# EAGLE board NusbioV2.Board (EAGLE 9.6.2)
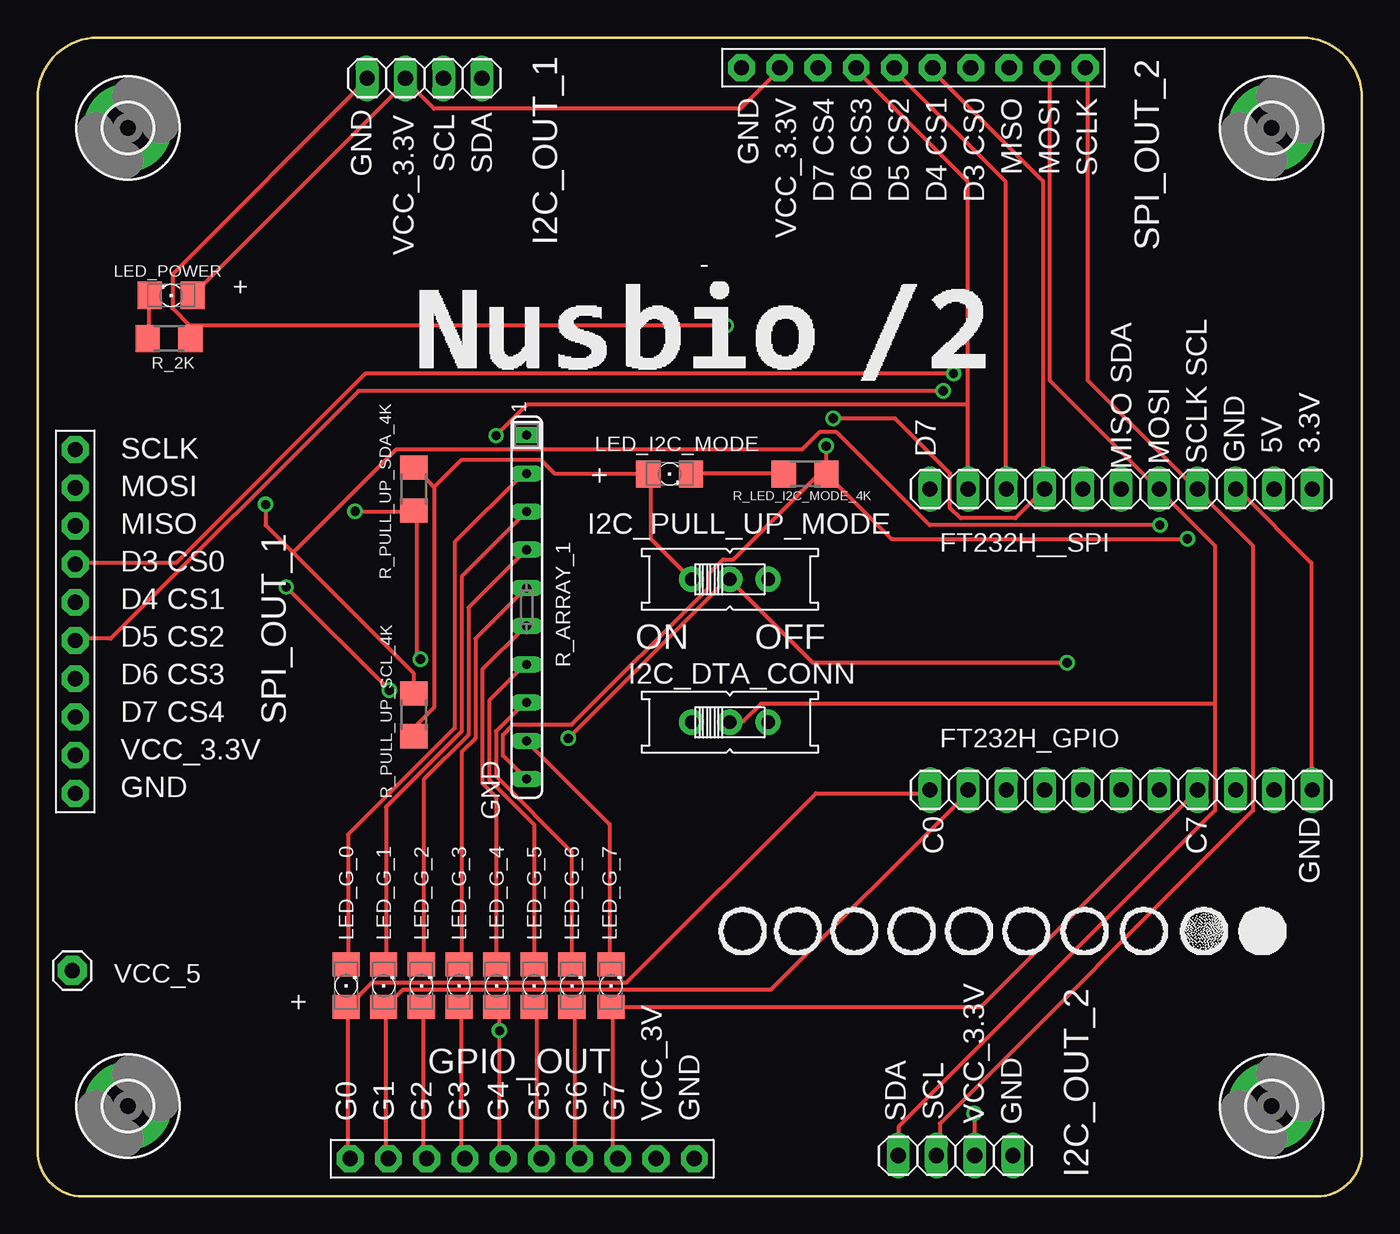
[diagram p0: board, top side]
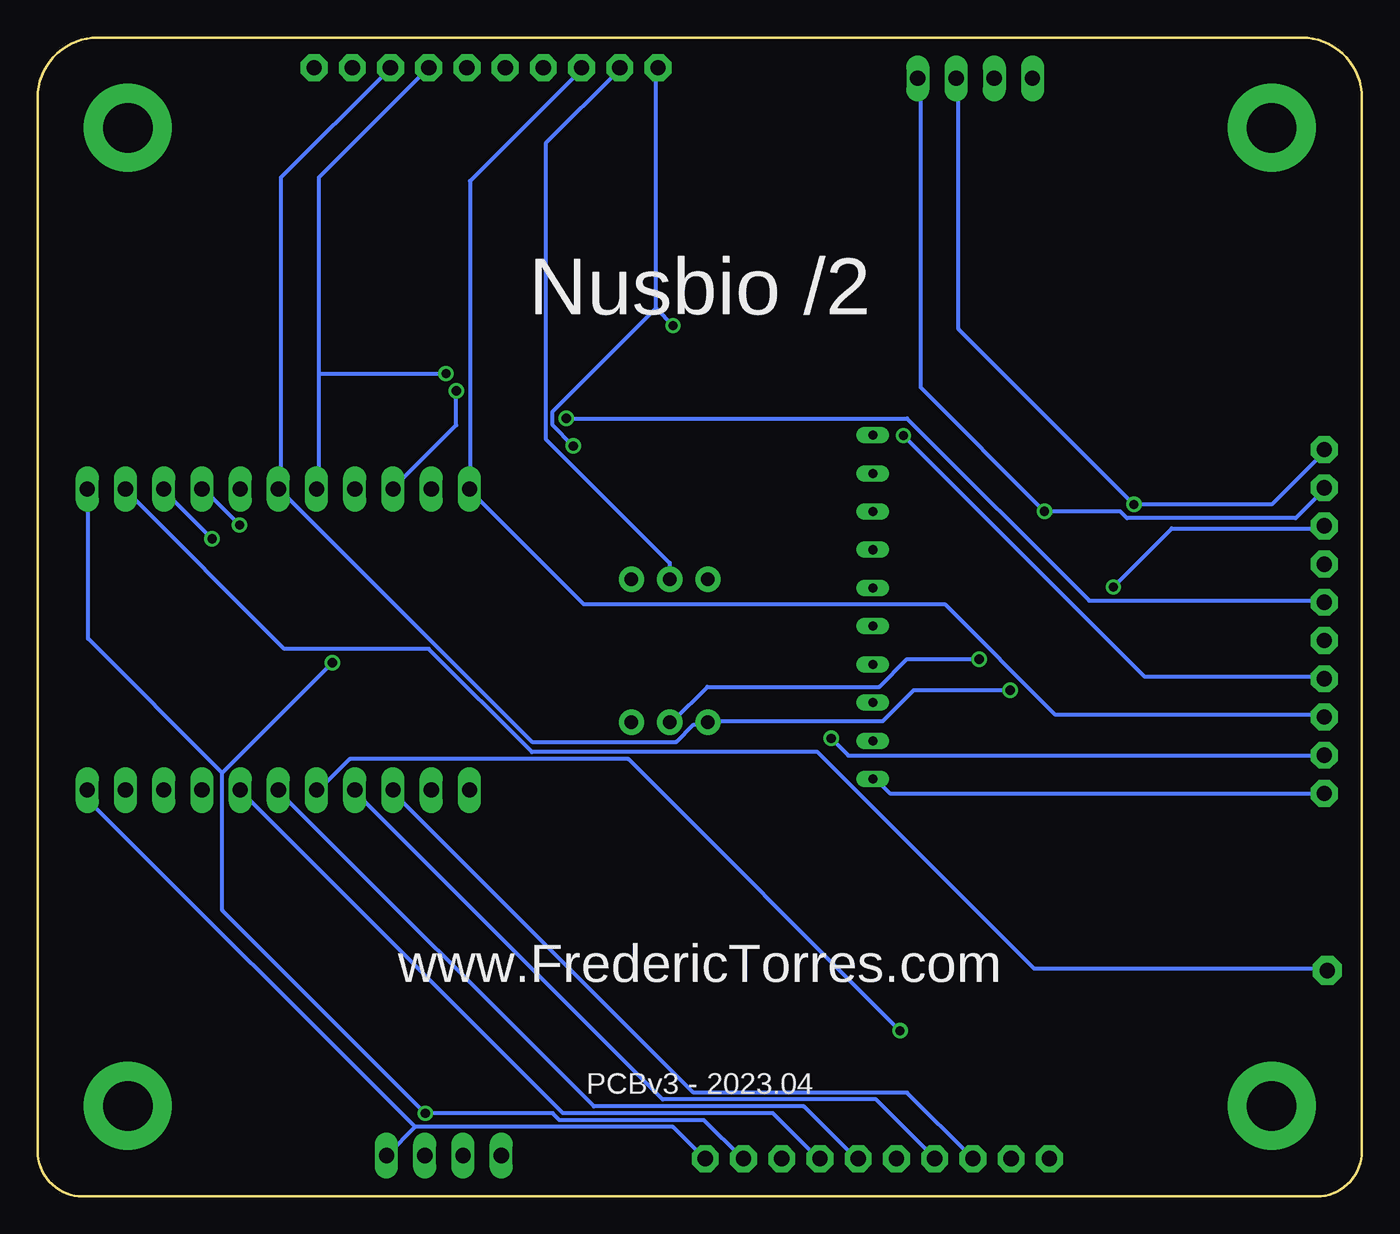
[diagram p1: board, bottom side, seen from below]

Size 88 x 77 mm. Coordinates in mm from the lower left corner, seen from the top.
Outline: 0,3 0,73 arc-90 4,77 84,77 arc-90 88,73 88,3 arc-90 85,0 3,0 arc-90 0,3
Copper layers (1*16): Top 0.035mm / dielectric 1.5mm / Bottom 0.035mm
Design rules "default": minimum track width 10mil, minimum drill 24mil, track to track 8mil, track to pad 8mil, pad to pad 8mil, via to via 8mil, smd to smd 8mil, copper to edge 40mil, drill to drill 8mil, minimum pad ring 10mil, minimum via ring 8mil, stop-mask expansion 4mil, vias tented up to drill 0mil, thermal gap 10mil

## Footprints (pad centres in the part's own frame; a part is rotated, then mirrored left to right if it is on the bottom)
1X11 = drill 1.016 long: 1 -12.7,0; 2 -10.16,0; 3 -7.62,0; 4 -5.08,0; 5 -2.54,0; 6 0,0; 7 2.54,0; 8 5.08,0; 9 7.62,0; 10 10.16,0; 11 12.7,0
1X10-BIG = drill 1.016 pad 1.778 octagon: 1 -11.43,0; 2 -8.89,0; 3 -6.35,0; 4 -3.81,0; 5 -1.27,0; 6 1.27,0; 7 3.81,0; 8 6.35,0; 9 8.89,0; 10 11.43,0
3,3-PAD = drill 3.3 pad 5.842: B3,3 0,0
EG1218 = drill 0.9 pad 1.676: O -2.54,0; P 0,0; S 2.54,0
1X04 = drill 1.016 long: 1 -3.81,0; 2 -1.27,0; 3 1.27,0; 4 3.81,0
1206 = smd 1.6 x 1.803: A -1.422,0; C 1.422,0
R1206 = smd 1.6 x 1.803: 1 -1.422,0; 2 1.422,0
SIP10 = drill 0.6 long: 1 -11.46,0; 2 -8.92,0; 3 -6.38,0; 4 -3.84,0; 5 -1.3,0; 6 1.24,0; 7 3.78,0; 8 6.32,0; 9 8.86,0; 10 11.4,0
1X01 = drill 1.016 pad 1.93 octagon: 1 0,0

## Placement (x,y rotation side)
FT232H__SPI  [1X11]  72,47 0 top
FT232H_GPIO  [1X11]  72,27 0 top
GPIO_OUT  PINHD-1X10  [1X10-BIG]  32.2,2.5 180 top
H1  MOUNT-PAD-ROUND3.3  [3,3-PAD]  82,6 0 top
H2  MOUNT-PAD-ROUND3.3  [3,3-PAD]  6,71 0 top
H3  MOUNT-PAD-ROUND3.3  [3,3-PAD]  6,6 0 top
H4  MOUNT-PAD-ROUND3.3  [3,3-PAD]  82,71 0 top
I2C_DTA_CONN  [EG1218]  46,31.5 0 top
I2C_OUT_1  [1X04]  25.7,74.3 180 top
I2C_OUT_2  [1X04]  61,2.7 0 top
I2C_PULL_UP_MODE  [EG1218]  46,41 0 top
LED_G_0  [1206]  20.5,14 90 top
LED_G_1  [1206]  23,14 90 top
LED_G_2  [1206]  25.5,14 90 top
LED_G_3  [1206]  28,14 90 top
LED_G_4  [1206]  30.5,14 90 top
LED_G_5  [1206]  33,14 90 top
LED_G_6  [1206]  35.5,14 90 top
LED_G_7  [1206]  38.1,14 90 top
LED_I2C_MODE  [1206]  42,48 0 top
LED_POWER  [1206]  8.88,59.87 180 top
R_2K  [R1206]  8.73,57 180 top
R_ARRAY_1  [SIP10]  32.5,39.12 270 top
R_LED_I2C_MODE_4K  [R1206]  51,48 180 top
R_PULL_UP_SCL_4K  [R1206]  25,32 270 top
R_PULL_UP_SDA_4K  [R1206]  25,47 90 top
SPI_OUT_1  PINHD-1X10  [1X10-BIG]  2.5,38.2 90 top
SPI_OUT_2  PINHD-1X10  [1X10-BIG]  58.2,75 0 top
VCC_5  [1X01]  2.3,15 0 top

## Library data of the parts
FT232H__SPI FT232H_GPIO I2C_OUT_1 I2C_OUT_2 = pinhead
GPIO_OUT I2C_DTA_CONN I2C_PULL_UP_MODE LED_G_0 LED_G_1-LED_G_7 LED_I2C_MODE LED_POWER R_2K R_LED_I2C_MODE_4K R_PULL_UP_SCL_4K R_PULL_UP_SDA_4K SPI_OUT_1 SPI_OUT_2 VCC_5 = adafruit
H1-H4 = holes
R_ARRAY_1 = resistor-sip

## Nets
C0: FT232H_GPIO.1 GPIO_OUT.10 LED_G_0.A
C1: FT232H_GPIO.2 GPIO_OUT.9 LED_G_1.A
C2: FT232H_GPIO.3 GPIO_OUT.8 LED_G_2.A
C3: FT232H_GPIO.4 GPIO_OUT.7 LED_G_3.A
C4: FT232H_GPIO.5 GPIO_OUT.6 LED_G_4.A
C5: FT232H_GPIO.6 GPIO_OUT.5 LED_G_5.A
C6: FT232H_GPIO.7 GPIO_OUT.4 LED_G_6.A
C7: FT232H_GPIO.8 GPIO_OUT.3 LED_G_7.A
D0_SCLK: FT232H__SPI.8 I2C_OUT_1.2 I2C_OUT_2.2 R_PULL_UP_SCL_4K.1 SPI_OUT_1.10 SPI_OUT_2.10
D1_MOSI: FT232H__SPI.7 I2C_DTA_CONN.P I2C_OUT_1.1 I2C_OUT_2.1 R_PULL_UP_SDA_4K.1 SPI_OUT_1.9 SPI_OUT_2.9
D2_MISO: FT232H__SPI.6 I2C_DTA_CONN.O SPI_OUT_1.8 SPI_OUT_2.8
D3_CS0: FT232H__SPI.5 SPI_OUT_1.7 SPI_OUT_2.7
D4_CS1: FT232H__SPI.4 SPI_OUT_1.6 SPI_OUT_2.6
D5_CS2: FT232H__SPI.3 SPI_OUT_1.5 SPI_OUT_2.5
D6_CS3: FT232H__SPI.2 SPI_OUT_1.4 SPI_OUT_2.4
D7_CS4: FT232H__SPI.1 SPI_OUT_1.3 SPI_OUT_2.3
DO_NOT_USE: R_ARRAY_1.1
GND: FT232H__SPI.9 FT232H_GPIO.11 GPIO_OUT.1 I2C_OUT_1.4 I2C_OUT_2.4 R_2K.1 R_ARRAY_1.10 R_LED_I2C_MODE_4K.1 SPI_OUT_1.1 SPI_OUT_2.1
N$1: LED_POWER.C R_2K.2
N$2: I2C_PULL_UP_MODE.O LED_I2C_MODE.A R_PULL_UP_SCL_4K.2 R_PULL_UP_SDA_4K.2
N$3: LED_I2C_MODE.C R_LED_I2C_MODE_4K.2
N$4: H1.B3,3
N$5: H4.B3,3
N$6: H3.B3,3
R_G_0: LED_G_0.C R_ARRAY_1.2
R_G_1: LED_G_1.C R_ARRAY_1.3
R_G_2: LED_G_2.C R_ARRAY_1.4
R_G_3: LED_G_3.C R_ARRAY_1.5
R_G_4: LED_G_4.C R_ARRAY_1.6
R_G_5: LED_G_5.C R_ARRAY_1.7
R_G_6: LED_G_6.C R_ARRAY_1.8
R_G_7: LED_G_7.C R_ARRAY_1.9
VCC_5: FT232H__SPI.10 VCC_5.1
VCC_33: FT232H__SPI.11 GPIO_OUT.2 I2C_OUT_1.3 I2C_OUT_2.3 I2C_PULL_UP_MODE.P LED_POWER.A SPI_OUT_1.2 SPI_OUT_2.2

## Tracks (layer width: path | path; a pad name or v marks a point on that pad's centre or on a via)
C0
  Top 0.254: GPIO_OUT.10 20.63,2.54 20.63,12.38 LED_G_0.A 20.63,12.6 22.23,14.2 39.15,14.2 51.72,26.78 59.27,26.78 FT232H_GPIO.1
C1
  Top 0.254: GPIO_OUT.9 23.15,2.54 23.15,12.38 LED_G_1.A 23.15,12.6 24.29,13.75 48.75,13.75 61.78,26.78 FT232H_GPIO.2
C2
  Top 0.254: LED_G_2.A 25.66,12.38 25.66,2.54 GPIO_OUT.8
  Bottom 0.254: FT232H_GPIO.3 64.29,26.78 44.41,6.89 30.23,6.89 25.89,2.54 GPIO_OUT.8
C3
  Top 0.254: LED_G_3.A 28.18,12.38 28.18,2.54 GPIO_OUT.7
  Bottom 0.254: FT232H_GPIO.4 66.81,26.78 46.46,6.43 32.29,6.43 28.4,2.54 GPIO_OUT.7
C4  (via drill 0.61)
  Top 0.254: LED_G_4.A 30.69,12.38 v30.69,11 30.69,2.77 30.92,2.54 GPIO_OUT.6
  Bottom 0.254: v30.69,11 48.75,29.06 67.27,29.06 69.32,27.01 FT232H_GPIO.5
C5
  Top 0.254: LED_G_5.A 33.2,12.38 33.2,2.77 33.43,2.54 GPIO_OUT.5
  Bottom 0.254: FT232H_GPIO.6 71.84,26.78 51.03,5.97 37.09,5.97 33.66,2.54 GPIO_OUT.5
C6
  Top 0.254: LED_G_6.A 35.72,12.38 35.72,2.77 35.95,2.54 GPIO_OUT.4
  Bottom 0.254: FT232H_GPIO.7 74.35,26.78 53.09,5.52 39.15,5.52 36.18,2.54 GPIO_OUT.4
C7
  Top 0.254: GPIO_OUT.3 38.46,2.54 38.23,2.77 38.23,12.38 LED_G_7.A 38.23,12.6 62.69,12.6 76.87,26.78 FT232H_GPIO.8
D0_SCLK  (via drill 0.61)
  Top 0.254: 16.97,42.78 15.14,44.61 v15.14,45.98 | 16.97,42.78 24.98,34.78 24.98,33.63 R_PULL_UP_SCL_4K.1 | I2C_OUT_2.2 59.95,2.77 59.95,4.83 80.75,25.63 80.75,43.24 77.1,46.89 FT232H__SPI.8 76.87,47.12 69.78,54.21 69.78,74.78 SPI_OUT_2.10 | 16.97,42.78 23.83,49.64 50.81,49.64 51.95,50.78 53.09,50.78 59.27,44.61 v74.58,44.61
  Bottom 0.254: SPI_OUT_1.10 2.57,49.41 6,45.98 v15.14,45.98 26.8,57.64 26.8,74.1 I2C_OUT_1.2 | v74.58,44.61 76.87,46.89 FT232H__SPI.8
D1_MOSI  (via drill 0.61)
  Top 0.254: v21.09,45.52 24.98,45.52 R_PULL_UP_SDA_4K.1 25.2,45.52 25.2,35.92 v25.43,35.69 | 78.24,32.72 78.24,43.24 74.58,46.89 FT232H__SPI.7 74.35,47.12 67.27,54.21 67.27,74.78 SPI_OUT_2.9 | 78.24,32.72 78.24,25.63 57.21,4.6 57.21,2.77 I2C_OUT_2.1 | 78.24,32.72 48.06,32.72 46.92,31.58 46.01,31.58 I2C_DTA_CONN.P
  Bottom 0.254: SPI_OUT_1.9 2.57,46.89 4.4,45.06 15.6,45.06 16.06,45.52 v21.09,45.52 29.32,53.75 29.32,74.1 I2C_OUT_1.1 | v25.43,35.69 30.23,35.69 32.06,33.86 43.49,33.86 45.78,31.58 I2C_DTA_CONN.P
D2_MISO  (via drill 0.61)
  Top 0.254: v23.38,33.63 v16.52,40.49
  Bottom 0.254: SPI_OUT_2.8 64.75,74.78 71.84,67.7 71.84,47.12 FT232H__SPI.6 71.84,46.89 55.15,30.2 45.55,30.2 44.41,31.35 43.49,31.35 I2C_DTA_CONN.O 43.26,31.58 31.83,31.58 29.77,33.63 v23.38,33.63 | v16.52,40.49 12.63,44.38 2.57,44.38 SPI_OUT_1.8
D3_CS0  (via drill 0.61)
  Top 0.254: v60.87,54.67 21.77,54.67 9.2,42.09 2.57,42.09 SPI_OUT_1.7
  Bottom 0.254: 69.32,54.67 69.32,67.7 62.24,74.78 SPI_OUT_2.7 | 69.32,54.67 69.32,47.12 FT232H__SPI.5 | 69.32,54.67 v60.87,54.67
D4_CS1  (via drill 0.61)
  Top 0.254: SPI_OUT_2.6 59.49,74.78 66.81,67.47 66.81,47.12 FT232H__SPI.4 66.81,46.89 64.98,45.06 61.32,45.06 60.64,45.75 60.64,48.04 56.98,51.69 v52.86,51.69
  Bottom 0.254: v52.86,51.69 30.23,51.69 18.12,39.58 2.57,39.58 SPI_OUT_1.6
D5_CS2  (via drill 0.61)
  Top 0.254: FT232H__SPI.3 64.29,47.12 64.29,67.47 56.98,74.78 SPI_OUT_2.5 | v60.18,53.52 21.32,53.52 4.86,37.06 2.57,37.06 SPI_OUT_1.5
  Bottom 0.254: v60.18,53.52 60.18,51.24 64.29,47.12 FT232H__SPI.3
D6_CS3  (via drill 0.61)
  Top 0.254: 61.78,52.61 61.78,67.47 54.46,74.78 SPI_OUT_2.4 | 61.78,52.61 61.78,47.12 FT232H__SPI.2 | v30.46,50.55 32.52,52.61 61.78,52.61
  Bottom 0.254: v30.46,50.55 14.46,34.55 2.57,34.55 SPI_OUT_1.4
D7_CS4
  Bottom 0.254: SPI_OUT_2.3 51.95,74.78 59.27,67.47 59.27,47.12 FT232H__SPI.1 59.27,46.89 51.72,39.35 27.72,39.35 20.4,32.03 2.57,32.03 SPI_OUT_1.3
GND  (via drill 0.61)
  Top 0.254: FT232H_GPIO.11 84.64,27.01 84.64,42.09 79.84,46.89 FT232H__SPI.9 | 10.12,57.87 10.12,57.18 R_2K.1 10.12,57.87 | 10.12,57.87 8.97,59.01 8.97,61.3 21.77,74.1 I2C_OUT_1.4 | R_LED_I2C_MODE_4K.1 52.41,47.81 51.72,47.81 46.23,42.32 45.55,42.32 44.63,41.41 44.63,40.49 35.49,31.35 31.6,31.35 30.92,30.66 30.92,29.29 32.29,27.92 R_ARRAY_1.10 | v52.41,49.87 52.41,48.04 R_LED_I2C_MODE_4K.1 | v45.78,57.87 10.12,57.87 | v76.41,43.69 56.75,43.69 52.63,47.81 R_LED_I2C_MODE_4K.1
  Bottom 0.254: 62.92,4.6 64.75,2.77 I2C_OUT_2.4 | 62.92,4.6 45.78,4.6 43.72,2.54 GPIO_OUT.1 | 62.92,4.6 84.64,26.32 84.64,26.78 FT232H_GPIO.11 | SPI_OUT_1.1 2.57,26.78 31.38,26.78 32.29,27.69 R_ARRAY_1.10 | 46.92,59.01 46.92,74.78 SPI_OUT_2.1 | 46.92,59.01 53.78,52.15 53.78,51.24 v52.41,49.87 | 46.92,59.01 v45.78,57.87 | v76.41,43.69 79.61,46.89 FT232H__SPI.9
N$1
  Top 0.254: R_2K.2 7.37,57.18 7.37,59.69 LED_POWER.C
N$2
  Top 0.254: I2C_PULL_UP_MODE.O 43.26,41.18 40.75,43.69 40.75,47.81 LED_I2C_MODE.A 40.52,48.04 34.35,48.04 33.43,48.95 28.18,48.95 26.35,47.12 | 26.35,47.12 26.35,32.49 25.2,31.35 25.2,30.66 R_PULL_UP_SCL_4K.2 | 26.35,47.12 25.2,48.27 R_PULL_UP_SDA_4K.2
N$3
  Top 0.254: LED_I2C_MODE.C 43.49,48.04 49.44,48.04 R_LED_I2C_MODE_4K.2
R_G_0
  Top 0.254: LED_G_0.C 20.63,15.57 20.63,24.03 27.72,31.12 27.72,43.46 32.29,48.04 R_ARRAY_1.2
R_G_1
  Top 0.254: LED_G_1.C 23.15,15.57 23.15,25.86 28.18,30.89 28.18,41.18 32.29,45.29 R_ARRAY_1.3
R_G_2
  Top 0.254: LED_G_2.C 25.66,15.57 25.66,27.69 28.63,30.66 28.63,39.12 32.29,42.78 R_ARRAY_1.4
R_G_3
  Top 0.254: LED_G_3.C 28.18,15.57 28.18,29.52 29.09,30.43 29.09,37.06 32.29,40.26 R_ARRAY_1.5
R_G_4
  Top 0.254: LED_G_4.C 30.46,15.57 30.46,26.55 29.55,27.46 29.55,35.01 32.29,37.75 R_ARRAY_1.6
R_G_5
  Top 0.254: LED_G_5.C 32.98,15.57 32.98,24.72 30,27.69 30,32.95 32.29,35.23 R_ARRAY_1.7
R_G_6
  Top 0.254: LED_G_6.C 35.49,15.57 35.49,22.89 30.46,27.92 30.46,30.89 32.29,32.72 R_ARRAY_1.8
R_G_7
  Top 0.254: LED_G_7.C 38.01,15.57 38.01,24.72 32.52,30.2 R_ARRAY_1.9
VCC_5
  Bottom 0.254: FT232H__SPI.10 82.12,46.89 71.61,36.38 62.01,36.38 55.15,29.52 36.18,29.52 21.77,15.12 2.34,15.12 VCC_5.1
VCC_33  (via drill 0.61)
  Top 0.254: v62.24,5.52 62.24,2.77 I2C_OUT_2.3 | 24.52,74.1 10.34,59.92 LED_POWER.A | v35.26,30.43 45.78,40.95 I2C_PULL_UP_MODE.P 46.01,40.95 51.49,35.46 v68.41,35.46 | 24.52,74.1 26.35,72.27 46.69,72.27 49.21,74.78 SPI_OUT_2.2 | 24.52,74.1 I2C_OUT_1.3
  Bottom 0.254: GPIO_OUT.2 41.2,2.54 43.72,5.06 53.32,5.06 53.78,5.52 v62.24,5.52 75.72,19 75.72,28.15 | 75.72,28.15 84.64,37.06 84.64,46.89 FT232H__SPI.11 | I2C_PULL_UP_MODE.P 46.01,41.18 46.01,42.09 54.24,50.32 54.24,69.98 49.44,74.78 SPI_OUT_2.2 | v35.26,30.43 34.12,29.29 2.57,29.29 SPI_OUT_1.2 | v68.41,35.46 75.72,28.15

## Text on the board
tNames: GND | VCC_3.3V | D7 CS4 | D6 CS3 | D5 CS2 | D4 CS1 | D3 CS0 | MISO | MOSI | SCLK | GND | SCL | SDA | VCC_3.3V | + | MISO SDA | SCLK SCL | MOSI | GND | 5V | 3.3V | D7 | SCLK | + | MOSI | MISO | D3 CS0 | D4 CS1 | D5 CS2 | ON | OFF | D6 CS3 | D7 CS4 | VCC_3.3V | GND | GND | C0 | C7 | GND | + | VCC_3.3V | SDA | SCL | GND | G0 | G1 | G2 | G3 | G4 | G5 | G6 | G7 | VCC_3V | GND
bNames: Nusbio /2 | www.FredericTorres.com | PCBv3 - 2023.04